# EAGLE board 8LedBoard (EAGLE 7.6.0)

Size 56.5 x 15 mm. Coordinates in mm from the lower left corner, seen from the top.
Outline: 0,0 56.5,0 56.5,15 0,15 0,0
Copper layers (1*16): Top 0.035mm / dielectric 1.5mm / Bottom 0.035mm
Design rules "default": minimum track width 10mil, minimum drill 24mil, track to track 8mil, track to pad 8mil, pad to pad 8mil, via to via 8mil, smd to smd 8mil, copper to edge 40mil, drill to drill 8mil, minimum pad ring 10mil, minimum via ring 8mil, stop-mask expansion 4mil, vias tented up to drill 0mil, thermal gap 10mil

## Footprints (pad centres in the part's own frame; a part is rotated, then mirrored left to right if it is on the bottom)
LED5MM = drill 0.813 pad 1.676 octagon: A -1.27,0; K 1.27,0
1X10-BIG = drill 1.016 pad 1.778 octagon: 1 -11.43,0; 2 -8.89,0; 3 -6.35,0; 4 -3.81,0; 5 -1.27,0; 6 1.27,0; 7 3.81,0; 8 6.35,0; 9 8.89,0; 10 11.43,0
SIP10 = drill 0.6 long: 1 -11.46,0; 2 -8.92,0; 3 -6.38,0; 4 -3.84,0; 5 -1.3,0; 6 1.24,0; 7 3.78,0; 8 6.32,0; 9 8.86,0; 10 11.4,0
0207/10 = drill 0.813 pad 1.676 octagon: 1 -5.08,0; 2 5.08,0

## Placement (x,y rotation side)
LBLUE1  [LED5MM]  46,10 0 top
LBLUE2  [LED5MM]  18,10 0 top
LGREEN1  [LED5MM]  32,10 0 top
LGREEN2  [LED5MM]  4,10 0 top
LRED1  [LED5MM]  53,10 0 top
LRED2  [LED5MM]  25,10 0 top
LYELLOW1  [LED5MM]  39,10 0 top
LYELLOW2  [LED5MM]  11,10 0 top
NUSBIO_HEADER  PINHD-1X10  [1X10-BIG]  28.5,1.4 180 top
RA_300O  [SIP10]  28.5,4.5 180 top
RGREEN1_2K  [0207/10]  49.5,2 180 top
RGREEN2_2K  [0207/10]  7.5,2 0 top

## Library data of the parts
LBLUE1 LBLUE2 LGREEN1 LGREEN2 LRED1 LRED2 LYELLOW1 LYELLOW2 NUSBIO_HEADER RGREEN1_2K RGREEN2_2K = adafruit
RA_300O = resistor-sip

## Nets
GND: NUSBIO_HEADER.10 RA_300O.1
N$2: LGREEN2.A NUSBIO_HEADER.8
N$3: LRED1.A NUSBIO_HEADER.1
N$4: LBLUE1.A NUSBIO_HEADER.2
N$5: LYELLOW1.A NUSBIO_HEADER.3
N$6: LGREEN1.A NUSBIO_HEADER.4
N$7: LRED2.A NUSBIO_HEADER.5
N$8: LBLUE2.A NUSBIO_HEADER.6
N$9: LYELLOW2.A NUSBIO_HEADER.7
N$10: LRED1.K RA_300O.2
N$11: LBLUE1.K RA_300O.3
N$12: LYELLOW1.K RA_300O.4
N$14: LRED2.K RA_300O.6
N$15: LBLUE2.K RA_300O.7
N$16: LYELLOW2.K RA_300O.8
N$17: LGREEN1.K RGREEN1_2K.1
N$18: RA_300O.5 RGREEN1_2K.2
N$19: LGREEN2.K RGREEN2_2K.1
N$20: RA_300O.9 RGREEN2_2K.2

## Tracks (layer width: path | path; a pad name or v marks a point on that pad's centre or on a via)
GND  (1 unrouted)
N$2  (1 unrouted)
N$3  (1 unrouted)
N$4  (1 unrouted)
N$5  (1 unrouted)
N$6  (1 unrouted)
N$7  (1 unrouted)
N$8  (1 unrouted)
N$9  (1 unrouted)
N$10  (1 unrouted)
N$11  (1 unrouted)
N$12  (1 unrouted)
N$14  (1 unrouted)
N$15  (1 unrouted)
N$16  (1 unrouted)
N$17  (1 unrouted)
N$18  (1 unrouted)
N$19  (1 unrouted)
N$20  (1 unrouted)

## Text on the board
tNames: + | + | GND
bNames: Nusbio LED Panel | MadeInTheUSB.net | PCBv3 - 2017.6